# Altium PCB PCB1.PcbDoc
Units mil, origin at the board's own origin, x right, y up, seen from the top; angles counter-clockwise.
Board outline 5300 x 3690 mil, 2 copper layers (Top Layer, Bottom Layer); 29 components, 20 nets, 94 pads, 8 vias.
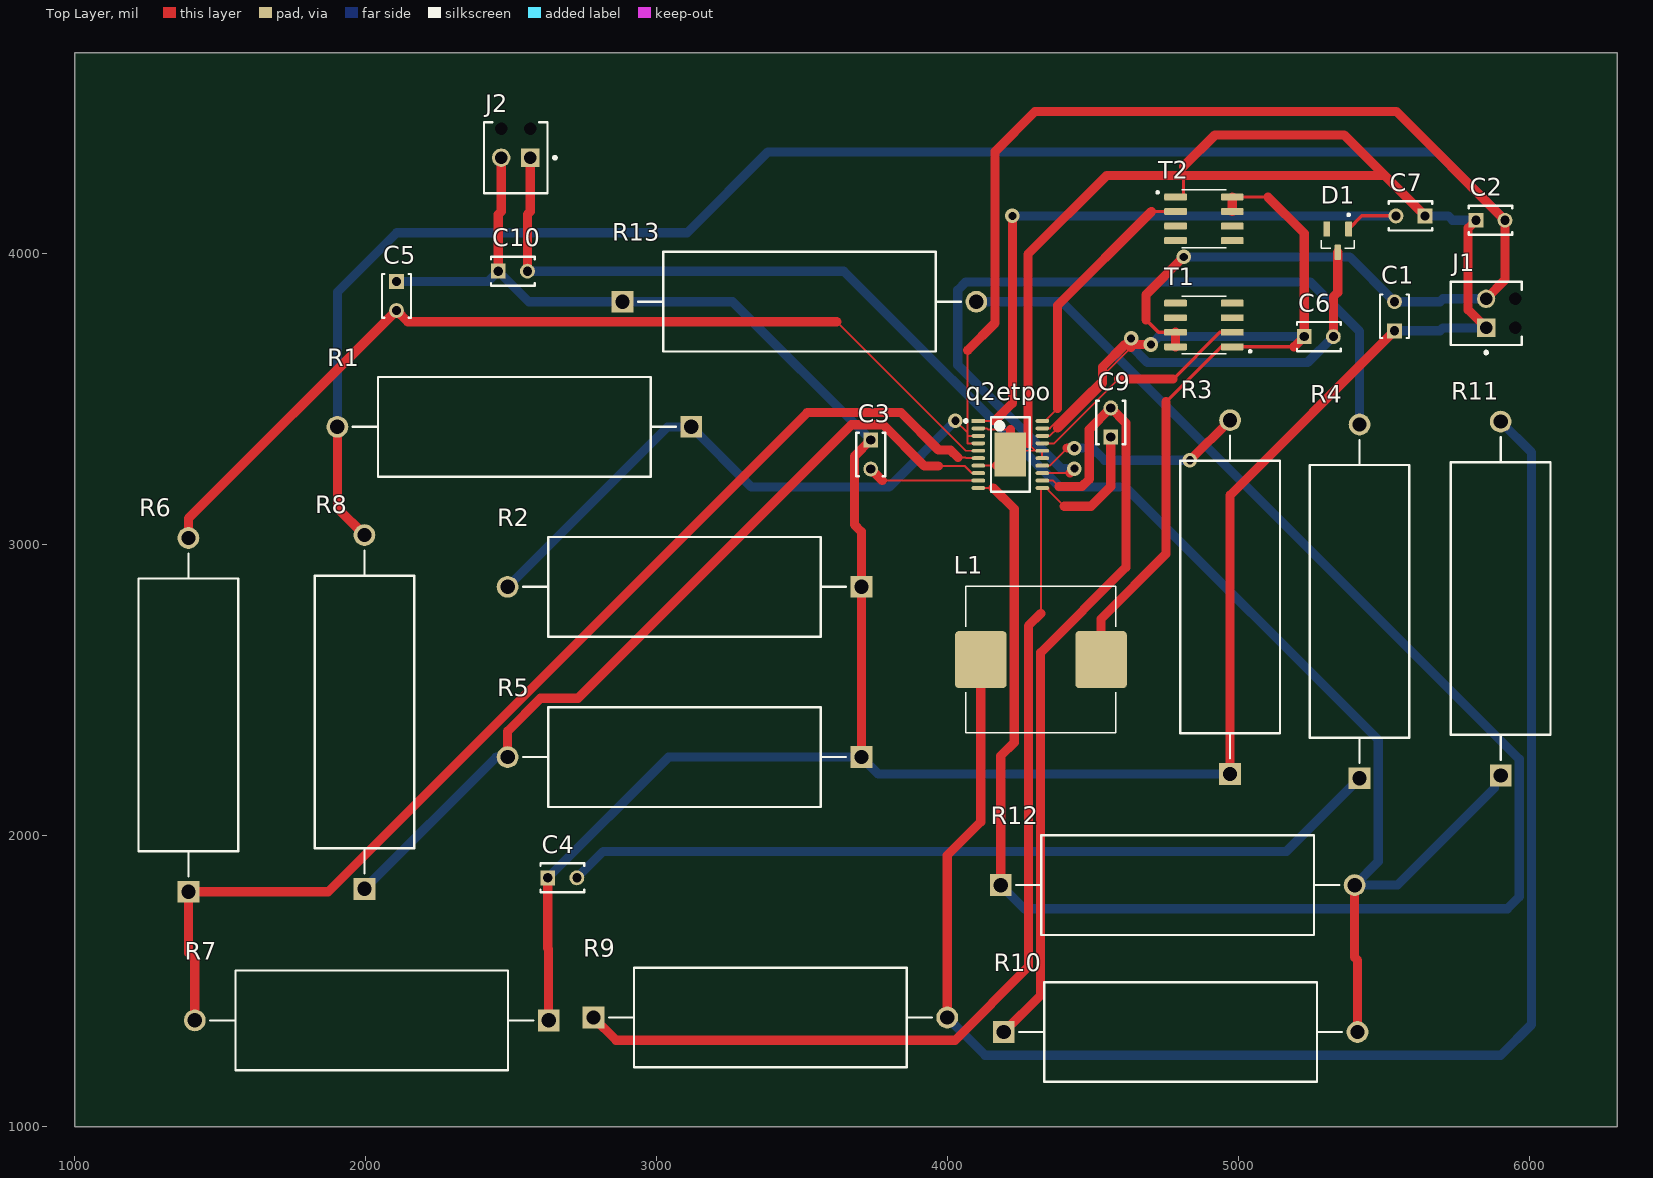
[diagram p0: Top Layer view]
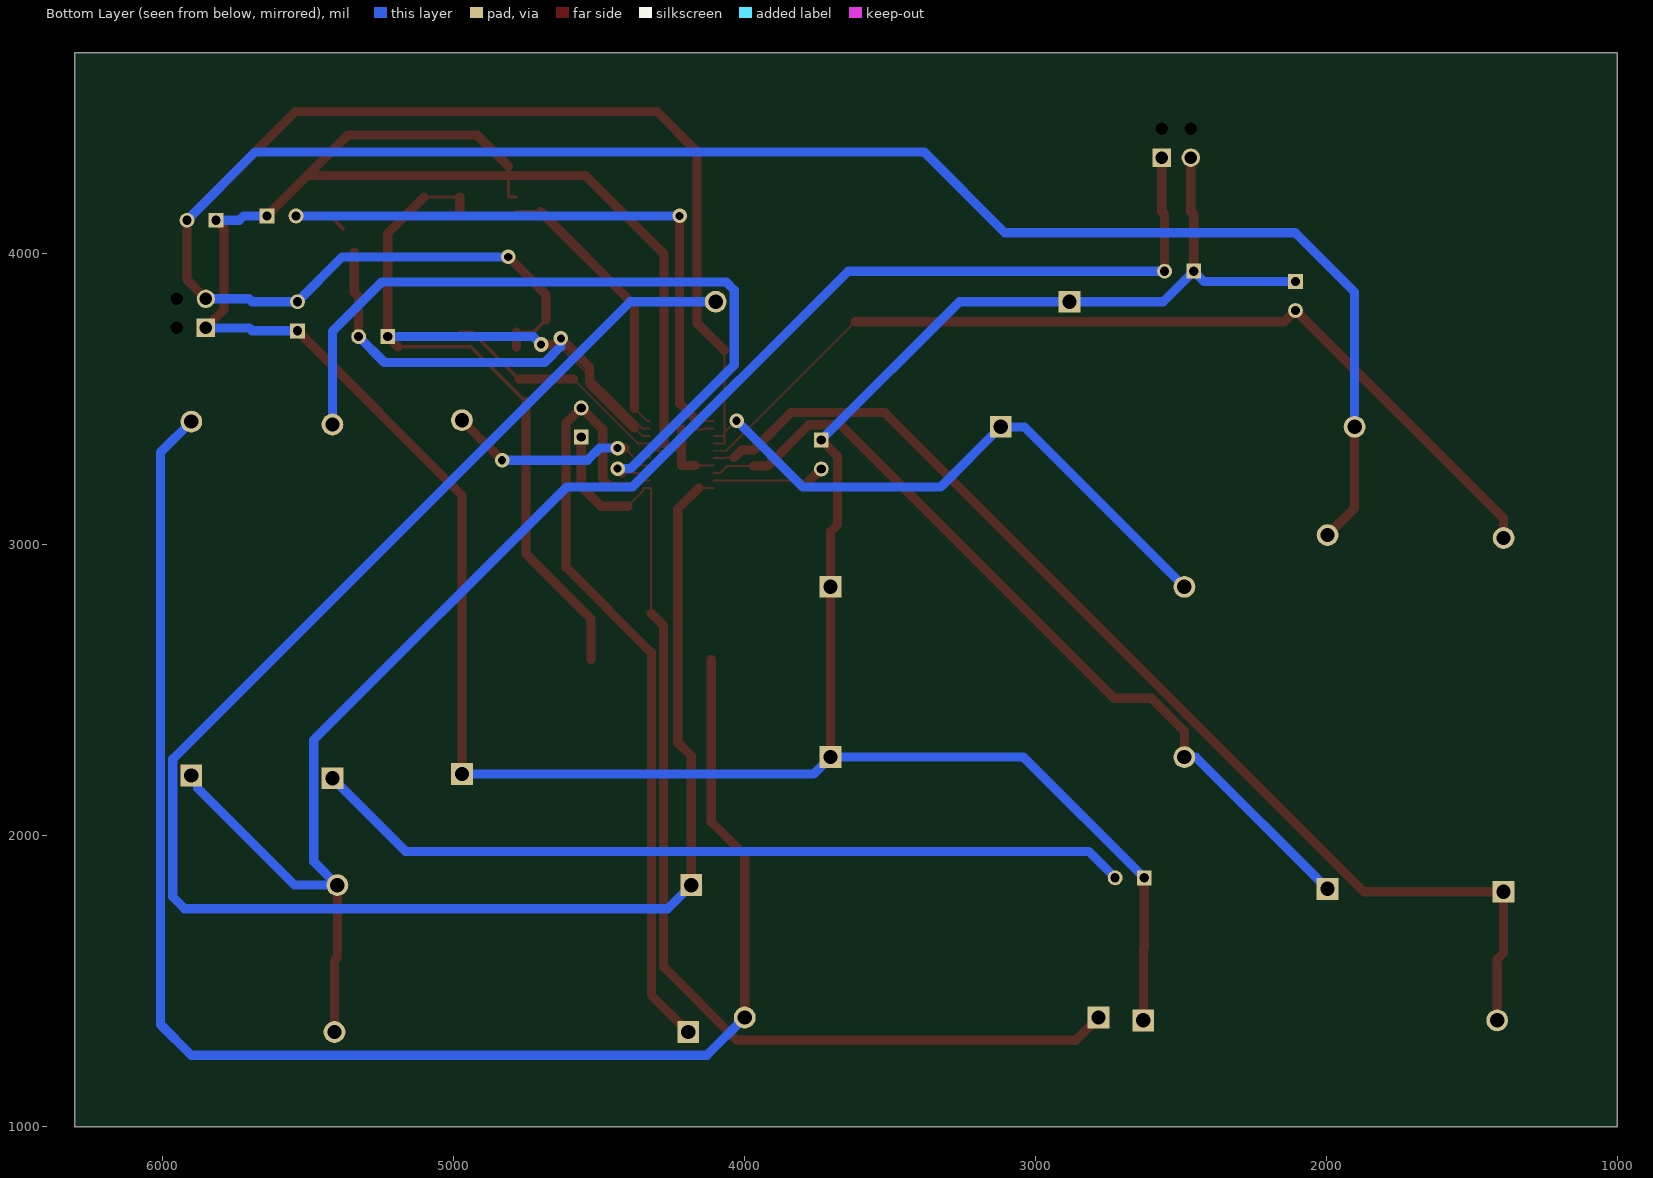
[diagram p1: Bottom Layer view, seen from below]
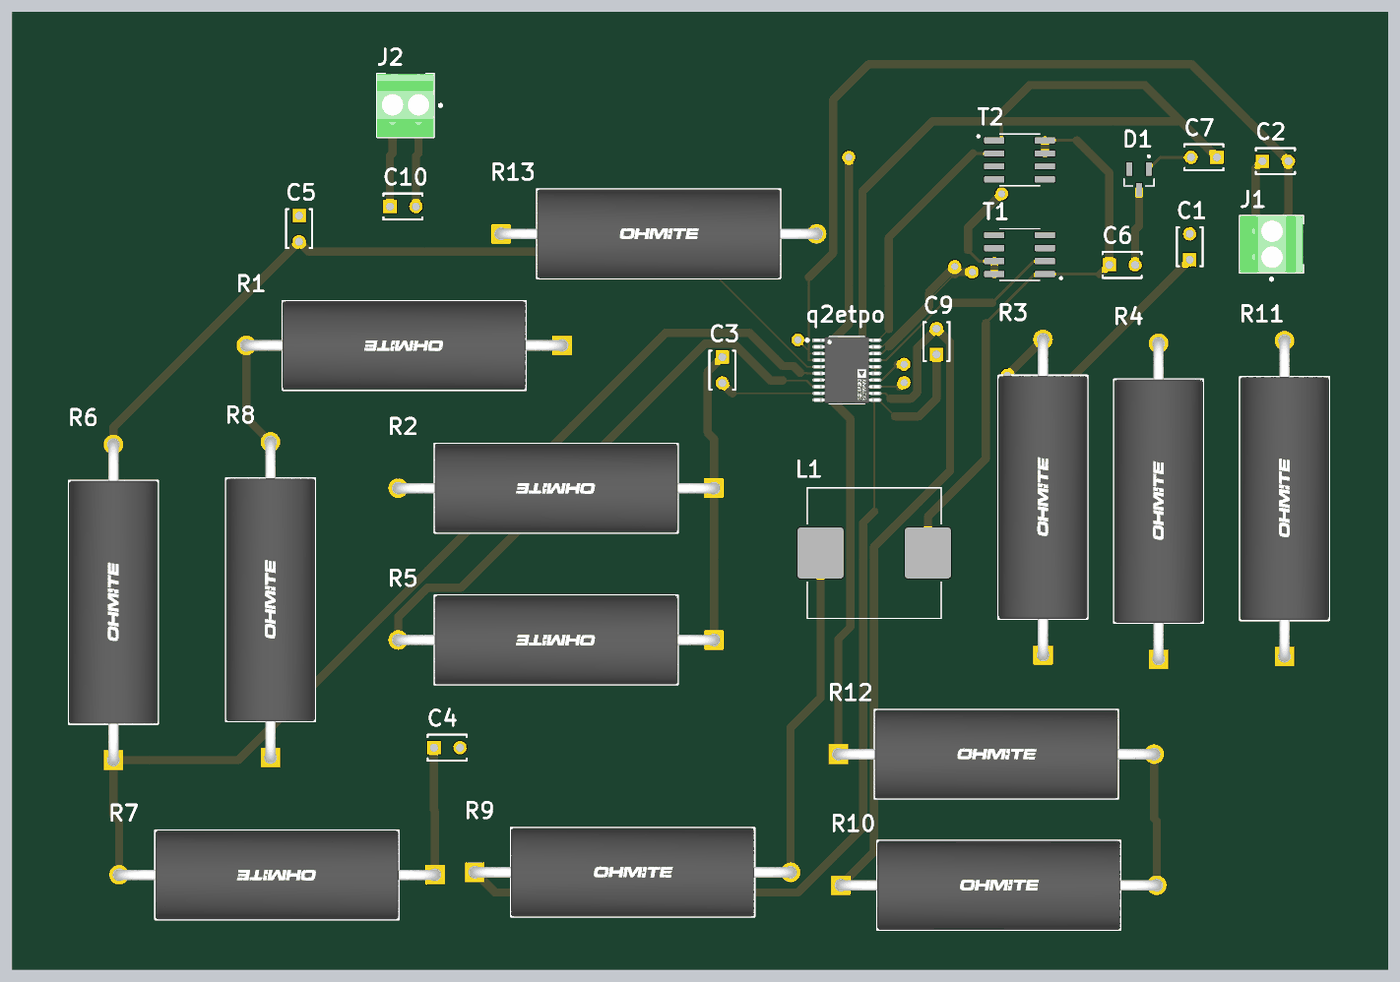
[diagram p2: 3D render of the assembled board from above, using the file's embedded part models]

## Layer stack, top to bottom
Top Solder: solder mask 0.4, Solder Resist, Dk 3.5
Top Layer: signal copper 1.4
Dielectric 1: dielectric 12.6, FR-4, Dk 4.8
Bottom Layer: signal copper 1.4
Bottom Solder: solder mask 0.4, Solder Resist, Dk 3.5

## Board outline
1000,1000 6300,1000 6300,4690 1000,4690

## Design rules (kind name [scope] priority, off if disabled: settings)
Clearance [All] p1: gap=10 ignorepadtopadclearanceinfootprint=TRUE except(0: Arc-Hole Track-Hole SMDPad-Hole THPad-Hole Via-Hole Fill-Hole Poly-Hole Region-Hole Text-Hole)
PolygonConnect [All] p1: connectstyle=Relief reliefconductorwidth=10 reliefentries=4 polygonreliefangle="90 Angle" airgapwidth=10
RoutingVias [All] p1: holewidth=28 width=50 viastyle="Through Hole" minholewidth=28 minwidth=50 maxholewidth=28 maxwidth=50
SMDNeckDown [All] p1: percent=50.000
SolderMaskExpansion [All] p1: expansion=4 istentingtop=FALSE
Width Width_1 [All] p1: maxlimit=31.5 minlimit=31.5 preferedwidth=31.5
Width [GND] p2: maxlimit=39.37 minlimit=39.37 preferedwidth=39.37
30 further rules are at their usual default settings.

## Components (designator, comment, footprint, x,y, rotation, side; value= is the part's Value field where it differs from the comment)
C1 "C315C100J2G5TA" KEMT-C315-THT-2 5535,3785 r90 top
C2 "C315C100J2G5TA" KEMT-C315-THT-2 5865,4115 r0 top
C3 "C315C100J2G5TA" KEMT-C315-THT-2 3735,3310 r270 top
C4 "C315C100J2G5TA" KEMT-C315-THT-2 2675,1855 r0 top
C5 "C315C100J2G5TA" KEMT-C315-THT-2 2105,3855 r270 top
C6 "C315C100J2G5TA" KEMT-C315-THT-2 5275,3715 r0 top
C7 "C315C100J2G5TA" KEMT-C315-THT-2 5590,4130 r180 top
C9 "C315C100J2G5TA" KEMT-C315-THT-2 4560,3420 r90 top
C10 "C315C100J2G5TA" KEMT-C315-THT-2 2505,3940 r0 top
D1 "BAT54_RF" SOT95P237X112-3N 5340,4045 r270 top
J1 "1725656" PHOE-1725656-2 5850,3795 r90 top
J2 "1725656" PHOE-1725656-2 2515,4330 r180 top
L1 "7443551131" IND_7443551131 4320,2605 r180 top
q2etpo "LT3741EFE#PBF" FP-FE-20-05-08-1663-CB-IPC_C 4215,3310 r0 top
R1 "15FR010E" FP-15FR010E-MFG 2510,3405 r180 top
R2 "15FR010E" FP-15FR010E-MFG 3095,2855 r180 top
R3 "15FR010E" FP-15FR010E-MFG 4970,2820 r90 top
R4 "15FR010E" FP-15FR010E-MFG 5415,2805 r90 top
R5 "15FR010E" FP-15FR010E-MFG 3095,2270 r180 top
R6 "15FR010E" FP-15FR010E-MFG 1390,2415 r90 top
R7 "15FR010E" FP-15FR010E-MFG 2020,1365 r180 top
R8 "15FR010E" FP-15FR010E-MFG 1995,2425 r90 top
R9 "15FR010E" FP-15FR010E-MFG 3390,1375 r0 top
R10 "15FR010E" FP-15FR010E-MFG 4800,1325 r0 top
R11 "15FR010E" FP-15FR010E-MFG 5900,2815 r90 top
R12 "15FR010E" FP-15FR010E-MFG 4790,1830 r0 top
R13 "15FR010E" FP-15FR010E-MFG 3490,3835 r0 top
T1 "CSD88539ND" SOIC127P600X175-8N 4880,3755 r180 top
T2 "CSD88539ND" SOIC127P600X175-8N 4880,4120 r0 top

## Footprints (in the part's own frame and the unit in brackets; to place one, negate y for a bottom-side part, rotate by r counter-clockwise, add the part's x,y. Pads: shape width x height; smd on the part's side, far side on the other; paste and mask are expansions set on the pad)
FP-15FR010E-MFG [mm]
  rect 1.9x1.9 hole 1.25 paste-1000 mask+0: 1(-15.444,0)
  round 1.9 hole 1.25 paste-1000 mask+0: 2(15.444,0)
  silkscreen extent -14.09,-4.35 14.09,4.35, body extent -16.49,-4.45 16.49,4.45, height 0.25
FP-FE-20-05-08-1663-CB-IPC_C [mm]
  rect 1.189x0.342 smd paste+0 mask+0: 1(-2.791,2.925)
  rrect100% 1.189x0.342 smd paste+0 mask+0: 2(-2.791,2.275) 3(-2.791,1.625) 4(-2.791,0.975) 5(-2.791,0.325) 6(-2.791,-0.325) 7(-2.791,-0.975) 8(-2.791,-1.625) 9(-2.791,-2.275) 10(-2.791,-2.925) 11(2.791,-2.925) 12(2.791,-2.275) 13(2.791,-1.625) 14(2.791,-0.975) 15(2.791,-0.325) 16(2.791,0.325) 17(2.791,0.975) 18(2.791,1.625) 19(2.791,2.275) 20(2.791,2.925)
  rect 2.74x3.86 smd paste-1000 mask+0: 21(0,0)
  silkscreen extent -4.01,-3.25 1.7,3.25, body extent -3.49,-3.35 3.49,3.35, height 0.25
IND_7443551131 [mm]
  rrect15% 4.5x5 smd: 1(-5.25,0) 2(5.25,0)
  silkscreen extent -6.55,-6.4 6.55,6.4
KEMT-C315-THT-2 [mm] "THD, 2-Leads, Body 3.81x2.54mm"
  rect 1.3x1.3 hole 0.8: 1(-1.27,0)
  round 1.3 hole 0.8: 2(1.27,0)
  silkscreen extent -1.91,-1.27 1.91,1.27, body extent -1.91,-1.27 1.91,1.27, height 4.66
PHOE-1725656-2 [mm] "Connector, 2-Leads, Body 6.2x5.4mm, Pitch 2.54mm"
  rect 1.6x1.6 hole 1.1: 1(-1.27,0)
  round 1.6 hole 1.1: 2(1.27,0)
  round 0 hole 1.1 unplated: MH1(-1.27,-2.54) MH2(1.27,-2.54)
  silkscreen extent -3.54,-3.1 2.77,3.1, body extent -2.77,-3.1 2.77,3.1, height 9
SOIC127P600X175-8N [mm]
  rrect25% 1.97x0.6 smd: 1(-2.475,1.905) 2(-2.475,0.635) 3(-2.475,-0.635) 4(-2.475,-1.905) 5(2.475,-1.905) 6(2.475,-0.635) 7(2.475,0.635) 8(2.475,1.905)
  silkscreen extent -4.14,-2.53 1.95,2.53
SOT95P237X112-3N [mm]
  rrect25% 1.32x0.59 smd: 1(-1.015,0.95) 2(-1.015,-0.95) 3(1.015,0)
  silkscreen extent -2.35,-1.46 0.65,1.46

## Part data
C1: library part CMP-1664-00009-1, "Capacitor, Ceramic, 10 pF, +/-5 %, 200 V, 2-Pin THD, RoHS, Bulk", Capacitance=32u, Case\Package=DIP, Max Dual Supply Voltage="16 V", Max Operating Temperature="70 degC", Min Dual Supply Voltage="1.5 V", Min Operating Temperature="0 degC", Nominal Supply Current="1.2 mA", Nominal Supply Voltage="5 V", Nominal Voltage Gain="100 dB", Output Current="30 mA", Package Quantity=50, Bandwidth="700 KHz", Channels=2, Common Mode Rejection Ratio="65 dB", ComponentLink1Description="Manufacturer URL", ComponentLink1URL=http://www.kemet.com/, ComponentLink2Description=Datasheet, ComponentLink2URL=http://capacitoredge.kemet.com/capedge2/DataSheet/Datasheet-C315C100J2G5TA.pdf?pn=C315C100J2G5TA{BULK}, DatasheetVersion=Aug-16, Max Supply Voltage="16 V", Min Supply Voltage="1.5 V", Mount="Through Hole", Nominal Gain Bandwith Product="700 KHz", PackageDescription="2-Pin Through Hole Device, Body 3.81 x 2.54 mm", PackageReference=C315-THT-2, Packaging=Rail/Tube, Pins=8, Radiation Hardening=No, REACH SVHC="No SVHC", RoHSCompliant=true, Slew Rate="0.3 V\us", Unity Gain Bandwidth Product="700 KHz"
C2: library part CMP-1664-00009-1, "Capacitor, Ceramic, 10 pF, +/-5 %, 200 V, 2-Pin THD, RoHS, Bulk", Capacitance=1u, Case\Package=DIP, Max Dual Supply Voltage="16 V", Max Operating Temperature="70 degC", Min Dual Supply Voltage="1.5 V", Min Operating Temperature="0 degC", Nominal Supply Current="1.2 mA", Nominal Supply Voltage="5 V", Nominal Voltage Gain="100 dB", Output Current="30 mA", Package Quantity=50, Bandwidth="700 KHz", Channels=2, Common Mode Rejection Ratio="65 dB", ComponentLink1Description="Manufacturer URL", ComponentLink1URL=http://www.kemet.com/, ComponentLink2Description=Datasheet, ComponentLink2URL=http://capacitoredge.kemet.com/capedge2/DataSheet/Datasheet-C315C100J2G5TA.pdf?pn=C315C100J2G5TA{BULK}, DatasheetVersion=Aug-16, Max Supply Voltage="16 V", Min Supply Voltage="1.5 V", Mount="Through Hole", Nominal Gain Bandwith Product="700 KHz", PackageDescription="2-Pin Through Hole Device, Body 3.81 x 2.54 mm", PackageReference=C315-THT-2, Packaging=Rail/Tube, Pins=8, Radiation Hardening=No, REACH SVHC="No SVHC", RoHSCompliant=true, Slew Rate="0.3 V\us", Unity Gain Bandwidth Product="700 KHz"
C3 C5: library part CMP-1664-00009-1, "Capacitor, Ceramic, 10 pF, +/-5 %, 200 V, 2-Pin THD, RoHS, Bulk", Capacitance=0.001u, Case\Package=DIP, Max Dual Supply Voltage="16 V", Max Operating Temperature="70 degC", Min Dual Supply Voltage="1.5 V", Min Operating Temperature="0 degC", Nominal Supply Current="1.2 mA", Nominal Supply Voltage="5 V", Nominal Voltage Gain="100 dB", Output Current="30 mA", Package Quantity=50, Bandwidth="700 KHz", Channels=2, Common Mode Rejection Ratio="65 dB", ComponentLink1Description="Manufacturer URL", ComponentLink1URL=http://www.kemet.com/, ComponentLink2Description=Datasheet, ComponentLink2URL=http://capacitoredge.kemet.com/capedge2/DataSheet/Datasheet-C315C100J2G5TA.pdf?pn=C315C100J2G5TA{BULK}, DatasheetVersion=Aug-16, Max Supply Voltage="16 V", Min Supply Voltage="1.5 V", Mount="Through Hole", Nominal Gain Bandwith Product="700 KHz", PackageDescription="2-Pin Through Hole Device, Body 3.81 x 2.54 mm", PackageReference=C315-THT-2, Packaging=Rail/Tube, Pins=8, Radiation Hardening=No, REACH SVHC="No SVHC", RoHSCompliant=true, Slew Rate="0.3 V\us", Unity Gain Bandwidth Product="700 KHz"
C4: library part CMP-1664-00009-1, "Capacitor, Ceramic, 10 pF, +/-5 %, 200 V, 2-Pin THD, RoHS, Bulk", Capacitance=4n, Case\Package=DIP, Max Dual Supply Voltage="16 V", Max Operating Temperature="70 degC", Min Dual Supply Voltage="1.5 V", Min Operating Temperature="0 degC", Nominal Supply Current="1.2 mA", Nominal Supply Voltage="5 V", Nominal Voltage Gain="100 dB", Output Current="30 mA", Package Quantity=50, Bandwidth="700 KHz", Channels=2, Common Mode Rejection Ratio="65 dB", ComponentLink1Description="Manufacturer URL", ComponentLink1URL=http://www.kemet.com/, ComponentLink2Description=Datasheet, ComponentLink2URL=http://capacitoredge.kemet.com/capedge2/DataSheet/Datasheet-C315C100J2G5TA.pdf?pn=C315C100J2G5TA{BULK}, DatasheetVersion=Aug-16, Max Supply Voltage="16 V", Min Supply Voltage="1.5 V", Mount="Through Hole", Nominal Gain Bandwith Product="700 KHz", PackageDescription="2-Pin Through Hole Device, Body 3.81 x 2.54 mm", PackageReference=C315-THT-2, Packaging=Rail/Tube, Pins=8, Radiation Hardening=No, REACH SVHC="No SVHC", RoHSCompliant=true, Slew Rate="0.3 V\us", Unity Gain Bandwidth Product="700 KHz"
C6: library part CMP-1664-00009-1, "Capacitor, Ceramic, 10 pF, +/-5 %, 200 V, 2-Pin THD, RoHS, Bulk", Capacitance=100n, Case\Package=DIP, Max Dual Supply Voltage="16 V", Max Operating Temperature="70 degC", Min Dual Supply Voltage="1.5 V", Min Operating Temperature="0 degC", Nominal Supply Current="1.2 mA", Nominal Supply Voltage="5 V", Nominal Voltage Gain="100 dB", Output Current="30 mA", Package Quantity=50, Bandwidth="700 KHz", Channels=2, Common Mode Rejection Ratio="65 dB", ComponentLink1Description="Manufacturer URL", ComponentLink1URL=http://www.kemet.com/, ComponentLink2Description=Datasheet, ComponentLink2URL=http://capacitoredge.kemet.com/capedge2/DataSheet/Datasheet-C315C100J2G5TA.pdf?pn=C315C100J2G5TA{BULK}, DatasheetVersion=Aug-16, Max Supply Voltage="16 V", Min Supply Voltage="1.5 V", Mount="Through Hole", Nominal Gain Bandwith Product="700 KHz", PackageDescription="2-Pin Through Hole Device, Body 3.81 x 2.54 mm", PackageReference=C315-THT-2, Packaging=Rail/Tube, Pins=8, Radiation Hardening=No, REACH SVHC="No SVHC", RoHSCompliant=true, Slew Rate="0.3 V\us", Unity Gain Bandwidth Product="700 KHz"
C7: library part CMP-1664-00009-1, "Capacitor, Ceramic, 10 pF, +/-5 %, 200 V, 2-Pin THD, RoHS, Bulk", Capacitance=20u, Case\Package=DIP, Max Dual Supply Voltage="16 V", Max Operating Temperature="70 degC", Min Dual Supply Voltage="1.5 V", Min Operating Temperature="0 degC", Nominal Supply Current="1.2 mA", Nominal Supply Voltage="5 V", Nominal Voltage Gain="100 dB", Output Current="30 mA", Package Quantity=50, Bandwidth="700 KHz", Channels=2, Common Mode Rejection Ratio="65 dB", ComponentLink1Description="Manufacturer URL", ComponentLink1URL=http://www.kemet.com/, ComponentLink2Description=Datasheet, ComponentLink2URL=http://capacitoredge.kemet.com/capedge2/DataSheet/Datasheet-C315C100J2G5TA.pdf?pn=C315C100J2G5TA{BULK}, DatasheetVersion=Aug-16, Max Supply Voltage="16 V", Min Supply Voltage="1.5 V", Mount="Through Hole", Nominal Gain Bandwith Product="700 KHz", PackageDescription="2-Pin Through Hole Device, Body 3.81 x 2.54 mm", PackageReference=C315-THT-2, Packaging=Rail/Tube, Pins=8, Radiation Hardening=No, REACH SVHC="No SVHC", RoHSCompliant=true, Slew Rate="0.3 V\us", Unity Gain Bandwidth Product="700 KHz"
C9: library part CMP-1664-00009-1, "Capacitor, Ceramic, 10 pF, +/-5 %, 200 V, 2-Pin THD, RoHS, Bulk", Capacitance=33n, Case\Package=DIP, Max Dual Supply Voltage="16 V", Max Operating Temperature="70 degC", Min Dual Supply Voltage="1.5 V", Min Operating Temperature="0 degC", Nominal Supply Current="1.2 mA", Nominal Supply Voltage="5 V", Nominal Voltage Gain="100 dB", Output Current="30 mA", Package Quantity=50, Bandwidth="700 KHz", Channels=2, Common Mode Rejection Ratio="65 dB", ComponentLink1Description="Manufacturer URL", ComponentLink1URL=http://www.kemet.com/, ComponentLink2Description=Datasheet, ComponentLink2URL=http://capacitoredge.kemet.com/capedge2/DataSheet/Datasheet-C315C100J2G5TA.pdf?pn=C315C100J2G5TA{BULK}, DatasheetVersion=Aug-16, Max Supply Voltage="16 V", Min Supply Voltage="1.5 V", Mount="Through Hole", Nominal Gain Bandwith Product="700 KHz", PackageDescription="2-Pin Through Hole Device, Body 3.81 x 2.54 mm", PackageReference=C315-THT-2, Packaging=Rail/Tube, Pins=8, Radiation Hardening=No, REACH SVHC="No SVHC", RoHSCompliant=true, Slew Rate="0.3 V\us", Unity Gain Bandwidth Product="700 KHz"
C10: library part CMP-1664-00009-1, "Capacitor, Ceramic, 10 pF, +/-5 %, 200 V, 2-Pin THD, RoHS, Bulk", Capacitance=160u, Case\Package=DIP, Max Dual Supply Voltage="16 V", Max Operating Temperature="70 degC", Min Dual Supply Voltage="1.5 V", Min Operating Temperature="0 degC", Nominal Supply Current="1.2 mA", Nominal Supply Voltage="5 V", Nominal Voltage Gain="100 dB", Output Current="30 mA", Package Quantity=50, Bandwidth="700 KHz", Channels=2, Common Mode Rejection Ratio="65 dB", ComponentLink1Description="Manufacturer URL", ComponentLink1URL=http://www.kemet.com/, ComponentLink2Description=Datasheet, ComponentLink2URL=http://capacitoredge.kemet.com/capedge2/DataSheet/Datasheet-C315C100J2G5TA.pdf?pn=C315C100J2G5TA{BULK}, DatasheetVersion=Aug-16, Max Supply Voltage="16 V", Min Supply Voltage="1.5 V", Mount="Through Hole", Nominal Gain Bandwith Product="700 KHz", PackageDescription="2-Pin Through Hole Device, Body 3.81 x 2.54 mm", PackageReference=C315-THT-2, Packaging=Rail/Tube, Pins=8, Radiation Hardening=No, REACH SVHC="No SVHC", RoHSCompliant=true, Slew Rate="0.3 V\us", Unity Gain Bandwidth Product="700 KHz"
D1: Package=None, Availability=Unavailable, MP=BAT54_RF, Price=None
J1 J2: library part CMP-2000-05299-1, "Male Header, Pitch 2.54 mm, 1 x 2 Position, Height 9 mm, Tail Length 3.5 mm", Colour=Green, Manufacturer="Phoenix Contact", Content=250pc(s), Datasheet URL=http://datasheet.octopart.com/1725656-Phoenix-Contact-datasheet-5302866.pdf, Datasheet Version=Apr-08, Industrial packaging=Yes, Manufacturer part No.=1725656, Manufacturer URL=http://www.phoenixcontact.com/, Number of contacts=2, Pitch=2.54mm, Type=MPT0,5/2-2,54
L1: "13ÂµH Shielded Wirewound Inductor 10A 11.2mOhm Nonstandard", Inductance=1.41u, Package="Nonstandard Wurth Electronics", Availability=Unavailable, DigiKey-Purchase-URL=https://snapeda.com/shop?store=DigiKey&id=1449219, MF="Wurth Electronics", Mouser-Purchase-URL=https://snapeda.com/shop?store=Mouser&id=1449219, MP=7443551131, Price=None, SnapEDA_Link=https://www.snapeda.com/parts/7443551131/Wurth%20Electronics%20Inc./view-part/1449219/?ref=snap
q2etpo: library part CMP-0477-00146-2, "IC REG CTRLR BUCK 20TSSOP", Case/Package=TSSOP, Max Frequency=1.07MHz, Max Input Voltage=36V, Max Operating Temperature=125°C, Max Output Current=20A, Max Output Voltage=34V, Min Input Voltage=6V, Min Operating Temperature=-40°C, Min Output Voltage=0V, Package Quantity=74, Efficiency=94%, Height=1.05mm, Length=6.6mm, Max Supply Voltage=36V, Min Supply Voltage=6V, Number of Outputs=1, Number of Pins=20, Output Current=20A, Output Type=Fixed, Packaging=Rail/Tube, Radiation Hardening=No, REACH SVHC="No SVHC", RoHS Compliant=Yes, Series=-, Switching Frequency=1.07MHz, Width=4.5mm
R1: library part CMP-33362-000004-1, "RES 0.01 OHM 5W 1% AXIAL", Case/Package=Axial, Max Operating Temperature=275°C, Max Power Dissipation=5W, Min Operating Temperature=-55°C, Package Quantity=10, Resistance=18k, Resistor Type="Metal Element", Temperature Coefficient=100ppm/°C, Tolerance=1%, Voltage Rating=100mV, Voltage Rating (AC)=220mV, Voltage Rating (DC)=1kV, Diameter=8.4mm, Lead Diameter=0.05mm, Lead Free="Lead Free", Lead Length=39.7mm, Length=23.8mm, Mount="Through Hole", Number of Terminations=2, Packaging=Bulk, Power Rating=5W, RoHS Compliant=Yes, Termination=Axial
R2: library part CMP-33362-000004-1, "RES 0.01 OHM 5W 1% AXIAL", Case/Package=Axial, Max Operating Temperature=275°C, Max Power Dissipation=5W, Min Operating Temperature=-55°C, Package Quantity=10, Resistance=3.6k, Resistor Type="Metal Element", Temperature Coefficient=100ppm/°C, Tolerance=1%, Voltage Rating=100mV, Voltage Rating (AC)=220mV, Voltage Rating (DC)=1kV, Diameter=8.4mm, Lead Diameter=0.05mm, Lead Free="Lead Free", Lead Length=39.7mm, Length=23.8mm, Mount="Through Hole", Number of Terminations=2, Packaging=Bulk, Power Rating=5W, RoHS Compliant=Yes, Termination=Axial
R3: library part CMP-33362-000004-1, "RES 0.01 OHM 5W 1% AXIAL", Case/Package=Axial, Max Operating Temperature=275°C, Max Power Dissipation=5W, Min Operating Temperature=-55°C, Package Quantity=10, Resistance=82.5k, Resistor Type="Metal Element", Temperature Coefficient=100ppm/°C, Tolerance=1%, Voltage Rating=100mV, Voltage Rating (AC)=220mV, Voltage Rating (DC)=1kV, Diameter=8.4mm, Lead Diameter=0.05mm, Lead Free="Lead Free", Lead Length=39.7mm, Length=23.8mm, Mount="Through Hole", Number of Terminations=2, Packaging=Bulk, Power Rating=5W, RoHS Compliant=Yes, Termination=Axial
R4 R5: library part CMP-33362-000004-1, "RES 0.01 OHM 5W 1% AXIAL", Case/Package=Axial, Max Operating Temperature=275°C, Max Power Dissipation=5W, Min Operating Temperature=-55°C, Package Quantity=10, Resistance=5k, Resistor Type="Metal Element", Temperature Coefficient=100ppm/°C, Tolerance=1%, Voltage Rating=100mV, Voltage Rating (AC)=220mV, Voltage Rating (DC)=1kV, Diameter=8.4mm, Lead Diameter=0.05mm, Lead Free="Lead Free", Lead Length=39.7mm, Length=23.8mm, Mount="Through Hole", Number of Terminations=2, Packaging=Bulk, Power Rating=5W, RoHS Compliant=Yes, Termination=Axial
R6: library part CMP-33362-000004-1, "RES 0.01 OHM 5W 1% AXIAL", Case/Package=Axial, Max Operating Temperature=275°C, Max Power Dissipation=5W, Min Operating Temperature=-55°C, Package Quantity=10, Resistance=45.3k, Resistor Type="Metal Element", Temperature Coefficient=100ppm/°C, Tolerance=1%, Voltage Rating=100mV, Voltage Rating (AC)=220mV, Voltage Rating (DC)=1kV, Diameter=8.4mm, Lead Diameter=0.05mm, Lead Free="Lead Free", Lead Length=39.7mm, Length=23.8mm, Mount="Through Hole", Number of Terminations=2, Packaging=Bulk, Power Rating=5W, RoHS Compliant=Yes, Termination=Axial
R7: library part CMP-33362-000004-1, "RES 0.01 OHM 5W 1% AXIAL", Case/Package=Axial, Max Operating Temperature=275°C, Max Power Dissipation=5W, Min Operating Temperature=-55°C, Package Quantity=10, Resistance=470k, Resistor Type="Metal Element", Temperature Coefficient=100ppm/°C, Tolerance=1%, Voltage Rating=100mV, Voltage Rating (AC)=220mV, Voltage Rating (DC)=1kV, Diameter=8.4mm, Lead Diameter=0.05mm, Lead Free="Lead Free", Lead Length=39.7mm, Length=23.8mm, Mount="Through Hole", Number of Terminations=2, Packaging=Bulk, Power Rating=5W, RoHS Compliant=Yes, Termination=Axial
R8: library part CMP-33362-000004-1, "RES 0.01 OHM 5W 1% AXIAL", Case/Package=Axial, Max Operating Temperature=275°C, Max Power Dissipation=5W, Min Operating Temperature=-55°C, Package Quantity=10, Resistance=120k, Resistor Type="Metal Element", Temperature Coefficient=100ppm/°C, Tolerance=1%, Voltage Rating=100mV, Voltage Rating (AC)=220mV, Voltage Rating (DC)=1kV, Diameter=8.4mm, Lead Diameter=0.05mm, Lead Free="Lead Free", Lead Length=39.7mm, Length=23.8mm, Mount="Through Hole", Number of Terminations=2, Packaging=Bulk, Power Rating=5W, RoHS Compliant=Yes, Termination=Axial
R9 R10: library part CMP-33362-000004-1, "RES 0.01 OHM 5W 1% AXIAL", Case/Package=Axial, Max Operating Temperature=275°C, Max Power Dissipation=5W, Min Operating Temperature=-55°C, Package Quantity=10, Resistor Type="Metal Element", Temperature Coefficient=100ppm/°C, Tolerance=1%, Voltage Rating=100mV, Voltage Rating (AC)=220mV, Voltage Rating (DC)=1kV, Diameter=8.4mm, Lead Diameter=0.05mm, Lead Free="Lead Free", Lead Length=39.7mm, Length=23.8mm, Mount="Through Hole", Number of Terminations=2, Packaging=Bulk, Power Rating=5W, Resistance=10, RoHS Compliant=Yes, Termination=Axial
R11: library part CMP-33362-000004-1, "RES 0.01 OHM 5W 1% AXIAL", Case/Package=Axial, Max Operating Temperature=275°C, Max Power Dissipation=5W, Min Operating Temperature=-55°C, Package Quantity=10, Resistance=5m, Resistor Type="Metal Element", Temperature Coefficient=100ppm/°C, Tolerance=1%, Voltage Rating=100mV, Voltage Rating (AC)=220mV, Voltage Rating (DC)=1kV, Diameter=8.4mm, Lead Diameter=0.05mm, Lead Free="Lead Free", Lead Length=39.7mm, Length=23.8mm, Mount="Through Hole", Number of Terminations=2, Packaging=Bulk, Power Rating=5W, RoHS Compliant=Yes, Termination=Axial
R12: library part CMP-33362-000004-1, "RES 0.01 OHM 5W 1% AXIAL", Case/Package=Axial, Max Operating Temperature=275°C, Max Power Dissipation=5W, Min Operating Temperature=-55°C, Package Quantity=10, Resistance=275.9k, Resistor Type="Metal Element", Temperature Coefficient=100ppm/°C, Tolerance=1%, Voltage Rating=100mV, Voltage Rating (AC)=220mV, Voltage Rating (DC)=1kV, Diameter=8.4mm, Lead Diameter=0.05mm, Lead Free="Lead Free", Lead Length=39.7mm, Length=23.8mm, Mount="Through Hole", Number of Terminations=2, Packaging=Bulk, Power Rating=5W, RoHS Compliant=Yes, Termination=Axial
R13: library part CMP-33362-000004-1, "RES 0.01 OHM 5W 1% AXIAL", Case/Package=Axial, Max Operating Temperature=275°C, Max Power Dissipation=5W, Min Operating Temperature=-55°C, Package Quantity=10, Resistance=12.1k, Resistor Type="Metal Element", Temperature Coefficient=100ppm/°C, Tolerance=1%, Voltage Rating=100mV, Voltage Rating (AC)=220mV, Voltage Rating (DC)=1kV, Diameter=8.4mm, Lead Diameter=0.05mm, Lead Free="Lead Free", Lead Length=39.7mm, Length=23.8mm, Mount="Through Hole", Number of Terminations=2, Packaging=Bulk, Power Rating=5W, RoHS Compliant=Yes, Termination=Axial
T1 T2: "60V, N ch NexFET MOSFET, dual SO-8, 28mOhm 8-SOIC -55 to 150", Package=None, Availability=Unavailable, MP=CSD88539ND, Price=None

## Via types
v1: diameter 50, hole 28, Top Layer to Bottom Layer, 8 vias

## Nets (pads, with @x,y where several pads share a name; then routed paths per layer and width w, separated by ;. In a path a pad name is that pad's centre, name@x,y a point inside that pad or via, vN(x,y) a via of type N, cw(c..) or ccw(c..) an arc to the next point about the centre after c; other vN are vias at no path point)
GND: C1.1 C2.1 C3.1 C4.1 C5.1 C7.1 C10.1 J1.1 J2.2 q2etpo.2 q2etpo.7 q2etpo.15 q2etpo.16 q2etpo.21 R2.1 R3.1 R5.1 R7.1 R13.1 T2.1 | length 12726.7
  Top Layer w6.72: q2etpo.7 q2etpo.21@4168,3271.61 ; q2etpo.2 4134.27,3399.57 4137.79,3396.05 4215,3396.05 ; q2etpo.21@4215,3322.8 4300,3322.8 ; 4275,3347.8 4300,3322.8 ; q2etpo.15 4324,3297.2 q2etpo.16@4324,3322.8 ; q2etpo.16 q2etpo.16@4324,3322.8 ; 4300,3322.8 q2etpo.16@4324,3322.8
  Top Layer w11.81: T2.1 4810,4195 4810,4269 4810,4300
  Top Layer w31.5: C10.1 2455,4135 2465,4145 J2.2 ; C4.1 2625,1613.04 2628.04,1610 R7.1 ; R5.1 R2.1 3703.04,3044.96 3679,3069 3679,3304 C3.1 ; q2etpo.21@4168,3271.61 4215,3271.61 q2etpo.21 4215,3322.8 4215,3396.05 ; 4275,3347.8 4275,3998 4546,4269 4810,4269 5501,4269 ; 4810,4300 4918,4408 5362,4408 5501,4269 ; R3.1 4970,3170 C1.1 ; C7.1 5501,4269 ; C2.1 5788,4088 5788,3807 J1.1
  Bottom Layer w31.5: C5.1 2420,3905 C10.1 2560,3835 R13.1 3260,3835 C3.1 ; C4.1 3040,2270 R5.1 3761.08,2211.96 R3.1 ; C1.1 5692,3735 5702,3745 J1.1 ; C7.1 5720,4130 5735,4115 C2.1
NetC1_2: C1.2 C2.2 J1.2 q2etpo.3 R1.2 R8.2 T1.7 T1.8 | length 10044.2
  Top Layer w6.72: 4068.36,3668.36 4068.36,3373.98 q2etpo.3
  Top Layer w11.81: 4681,3773 4724,3730 T1.7
  Top Layer w31.5: R1.2 1901.96,3126.08 R8.2 ; 4068.36,3668.36 4162,3762 4162,4351 4300,4489 5541,4489 C2.2 5915,3910 J1.2 ; 4681,3773 4681,3859 v1(4811,3989) ; T1.8 T1.7
  Bottom Layer w31.5: R1.2 1901.96,3867.96 2106,4072 3104,4072 3382,4350 5680,4350 C2.2 ; v1(4811,3989) 5381,3989 C1.2 5692,3835 5702,3845 J1.2
NetC3_2: C3.2 q2etpo.9 | length 386.5
  Top Layer w6.72: 3774.57,3220.43 q2etpo.9
  Top Layer w31.5: C3.2 3774.57,3220.43
NetC4_2: C4.2 R4.1 | length 2831.6
  Bottom Layer w31.5: C4.2 2816,1946 5164.04,1946 R4.1
NetC5_2: C5.2 q2etpo.5 R6.2 | length 3278
  Top Layer w6.72: 3618,3766 4061.2,3322.8 q2etpo.5
  Top Layer w31.5: R6.2 1390,3090 C5.2 2144,3766 3618,3766
NetC6_1: C6.1 L1.1 q2etpo.18 T1.1 T2.7 T2.8 | length 3324.3
  Top Layer w6.72: q2etpo.18 4350.2,3373.98 4377,3400.77
  Top Layer w11.81: 4750,3491 4939,3680 T1.1 5190,3680 ; T2.8 5100,4195
  Top Layer w31.5: 4377,3400.77 4532,3555.77 4532,3611 4609,3688 v1(4698,3688) ; L1.1 4526.69,2745 4750,2968.31 4750,3491 ; T2.7 T2.8 ; 5100,4195 5225,4070 C6.1 5190,3680
  Bottom Layer w31.5: v1(4698,3688) 4725,3715 C6.1
NetC6_2: C6.2 D1.3 q2etpo.19 | length 1529.4
  Top Layer w6.72: q2etpo.19 4350.88,3399.57 4630,3678.69
  Top Layer w31.5: 4630,3678.69 v1(4630,3709) ; C6.2 5325,3852 5340,3867 D1.3
  Bottom Layer w31.5: v1(4630,3709) 4630,3682 4686,3626 5236,3626 C6.2
NetC7_2: C7.2 D1.1 q2etpo.1 | length 2285.2
  Top Layer w6.72: q2etpo.1 4161,3425.16
  Top Layer w11.61: D1.1 5422.44,4130 C7.2
  Top Layer w31.5: 4161,3425.16 4222,3486.16 v1(4222,4130)
  Bottom Layer w31.5: v1(4222,4130) C7.2
NetC9_1: C9.1 q2etpo.11 R9.1 | length 3764.6
  Top Layer w6.72: 4320,2764 4320,3194.84 q2etpo.11 4345.34,3194.84 4345.34,3186.48 4400,3131.82
  Top Layer w31.5: R9.1 2859.96,1297 4025,1297 4277,1549 4277,2721 4320,2764 ; 4400,3131.82 4491.82,3131.82 4560,3200 C9.1
NetC9_2: C9.2 q2etpo.12 R10.1 | length 2795.9
  Top Layer w6.72: q2etpo.12 4362.07,3220.43 4382.5,3200
  Top Layer w31.5: R10.1 4319,1452.04 4319,2629 4612,2922 4612,3418 C9.2 4485.75,3395.75 4485.75,3225.11 4460.64,3200 4382.5,3200
NetC10_2: C10.2 J2.1 R10.2 R11.1 R12.2 | length 5698.1
  Top Layer w31.5: C10.2 2555,4135 2565,4145 J2.1 ; R12.2 5398.04,1582 5408.04,1572 R10.2
  Bottom Layer w31.5: C10.2 3642.5,3940 4384.25,3198.25 4609.75,3198.25 5479,2329 5479,1910.96 R12.2 5545,1830 5878.35,2163.35 5878.35,2185.31 R11.1
NetL1_2: L1.2 R9.2 R11.2 | length 5499.4
  Top Layer w31.5: R9.2 3998.04,1932 4113.31,2047.27 L1.2
  Bottom Layer w31.5: R9.2 4128.04,1245 5900,1245 6006,1351 6006,3317.04 R11.2
Netq2etpo_4: q2etpo.4 R1.1 R2.2 | length 2079.2
  Top Layer w6.72: v1(4026,3426) 4068,3384 4068,3348.39 q2etpo.4
  Bottom Layer w31.5: R2.2 3036.96,3405 R1.1 3325.04,3198 3798,3198 v1(4026,3426)
Netq2etpo_6: q2etpo.6 R6.1 R7.2 | length 3913.4
  Top Layer w6.72: 4035.24,3299.19 4061.06,3299.19 4063.04,3297.2 q2etpo.6
  Top Layer w31.5: R7.2 1411.96,1575 1390,1596.96 R6.1 1869.96,1806.96 3517,3454 3839.37,3454 3967.84,3325.53 4008.9,3325.53 4035.24,3299.19
Netq2etpo_8: q2etpo.8 R5.2 R8.1 | length 2891.7
  Top Layer w6.72: 3967,3270 4059.02,3270 4083,3246.02 q2etpo.8
  Top Layer w31.5: R5.2 2486.96,2358.96 2600,2472 2729,2472 3669,3412 3778,3412 3920,3270 3967,3270
  Bottom Layer w31.5: R8.1 2448.04,2270 R5.2
Netq2etpo_10: q2etpo.10 R12.1 R13.2 | length 6287.3
  Top Layer w6.72: q2etpo.10 4156,3194.84
  Top Layer w31.5: 4156,3194.84 4228,3122.84 4228,2319.99 4181.96,2273.95 R12.1
  Bottom Layer w31.5: R13.2 4392,3835 5964,2263 5964,1790 5923,1749 4262.96,1749 R12.1
Netq2etpo_13: q2etpo.13 R4.2 | length 2705.2
  Top Layer w6.72: q2etpo.13 v1@4419.34,3246.02
  Top Layer w31.5: v1@4419.34,3246.02 v1(4435,3261.68)
  Bottom Layer w31.5: v1(4435,3261.68) 4389.83,3261.68 4034,3617.51 4034,3875 4061.68,3902.68 5245.32,3902.68 5415,3733 R4.2
Netq2etpo_14: q2etpo.14 R3.2 | length 744.7
  Top Layer w6.72: q2etpo.14 4350,3271.61 v1@4410.39,3332
  Top Layer w31.5: v1@4410.39,3332 v1(4435,3332) ; v1(4831.96,3290) R3.2
  Bottom Layer w31.5: v1(4435,3332) 4497,3332 4539,3290 v1(4831.96,3290)
Netq2etpo_17: q2etpo.17 T1.2 | length 810.6
  Top Layer w6.72: q2etpo.17 4365.78,3348.39 4586.39,3569
  Top Layer w11.81: 4774,3569 4935,3730 T1.2
  Top Layer w31.5: 4586.39,3569 4774,3569
Netq2etpo_20: q2etpo.20 T2.2 | length 963.1
  Top Layer w6.72: q2etpo.20 4334,3425.16 4376.64,3467.8
  Top Layer w11.81: 4700,4145 T2.2
  Top Layer w31.5: 4376.64,3467.8 4376.64,3821.64 4700,4145
pads on no net: D1.2 J1.MH1 J1.MH2 J2.MH1 J2.MH2 T1.3 T1.4 T1.5 T1.6 T2.3 T2.4 T2.5 T2.6